# Altium PCB remote.PcbDoc
Units mm, origin at the board's own origin, x right, y up, seen from the top; angles counter-clockwise.
Board outline 152.4 x 101.6 mm, 2 copper layers (Top Layer, Bottom Layer); 18 components, 20 nets, 126 pads, 0 vias.
Unrouted connection lines stored in the file: 19.
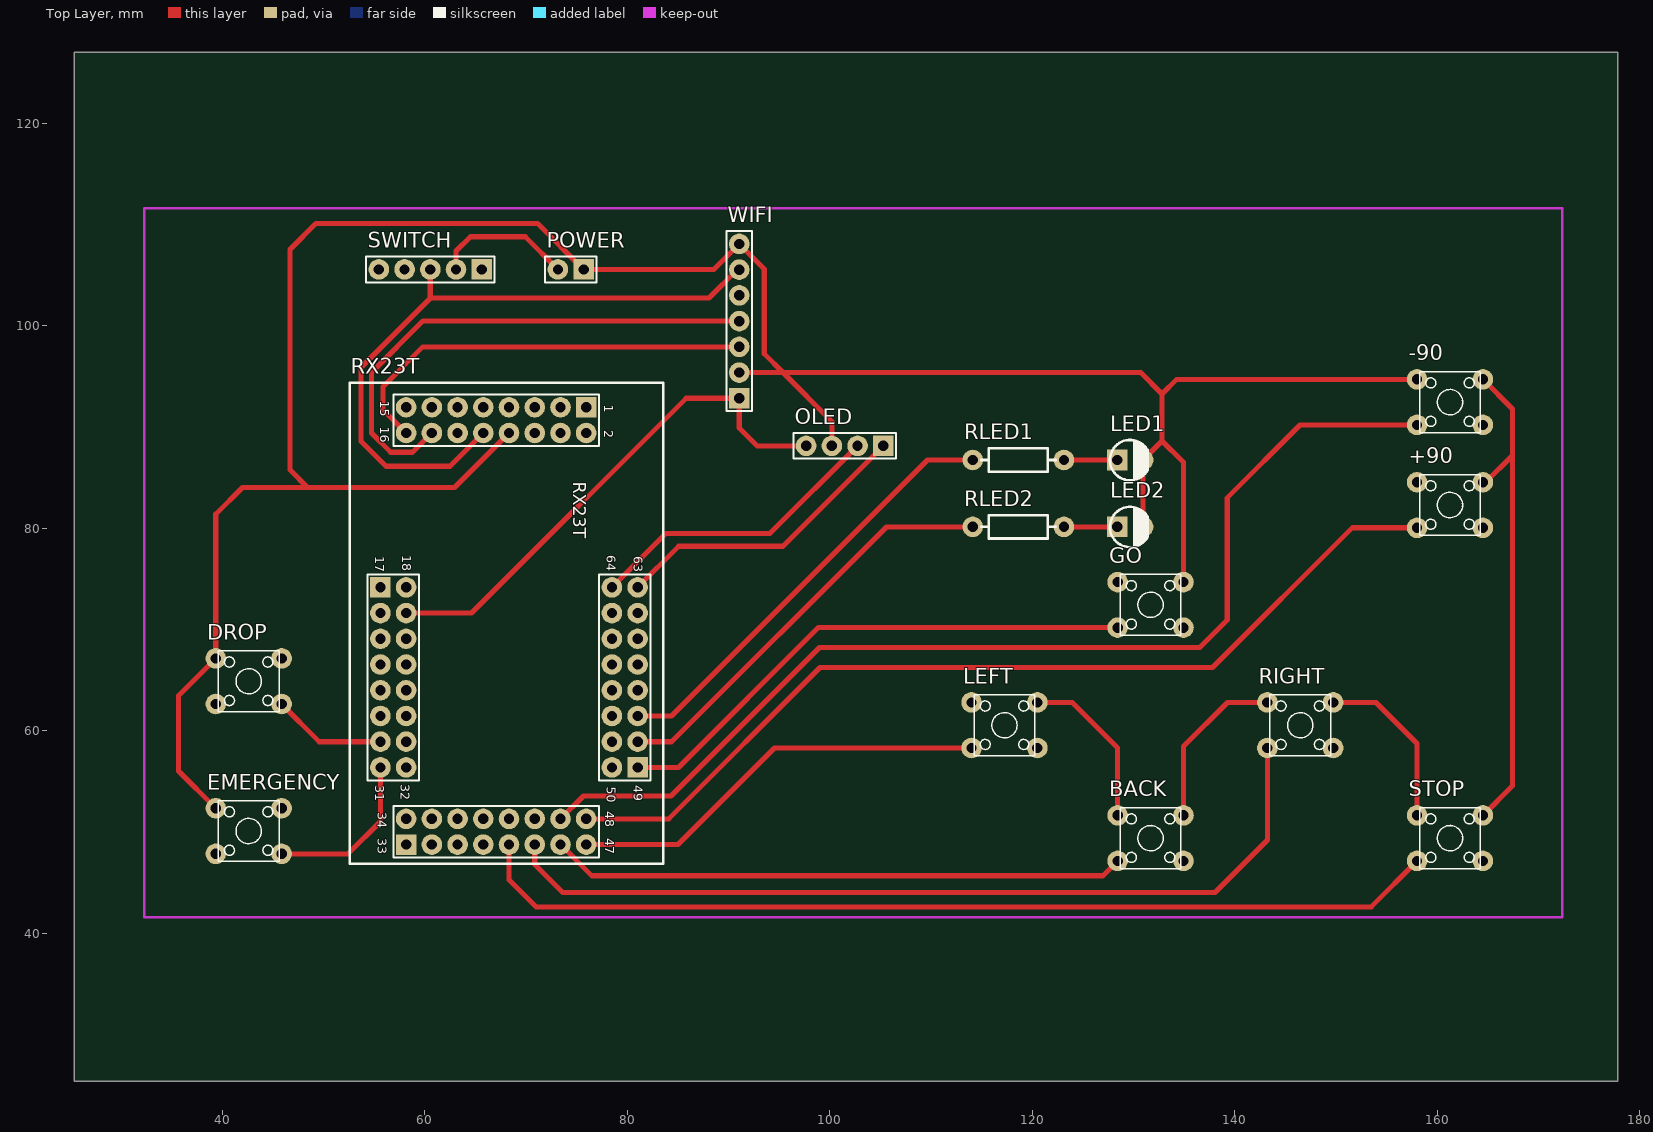
[diagram p0: Top Layer view]
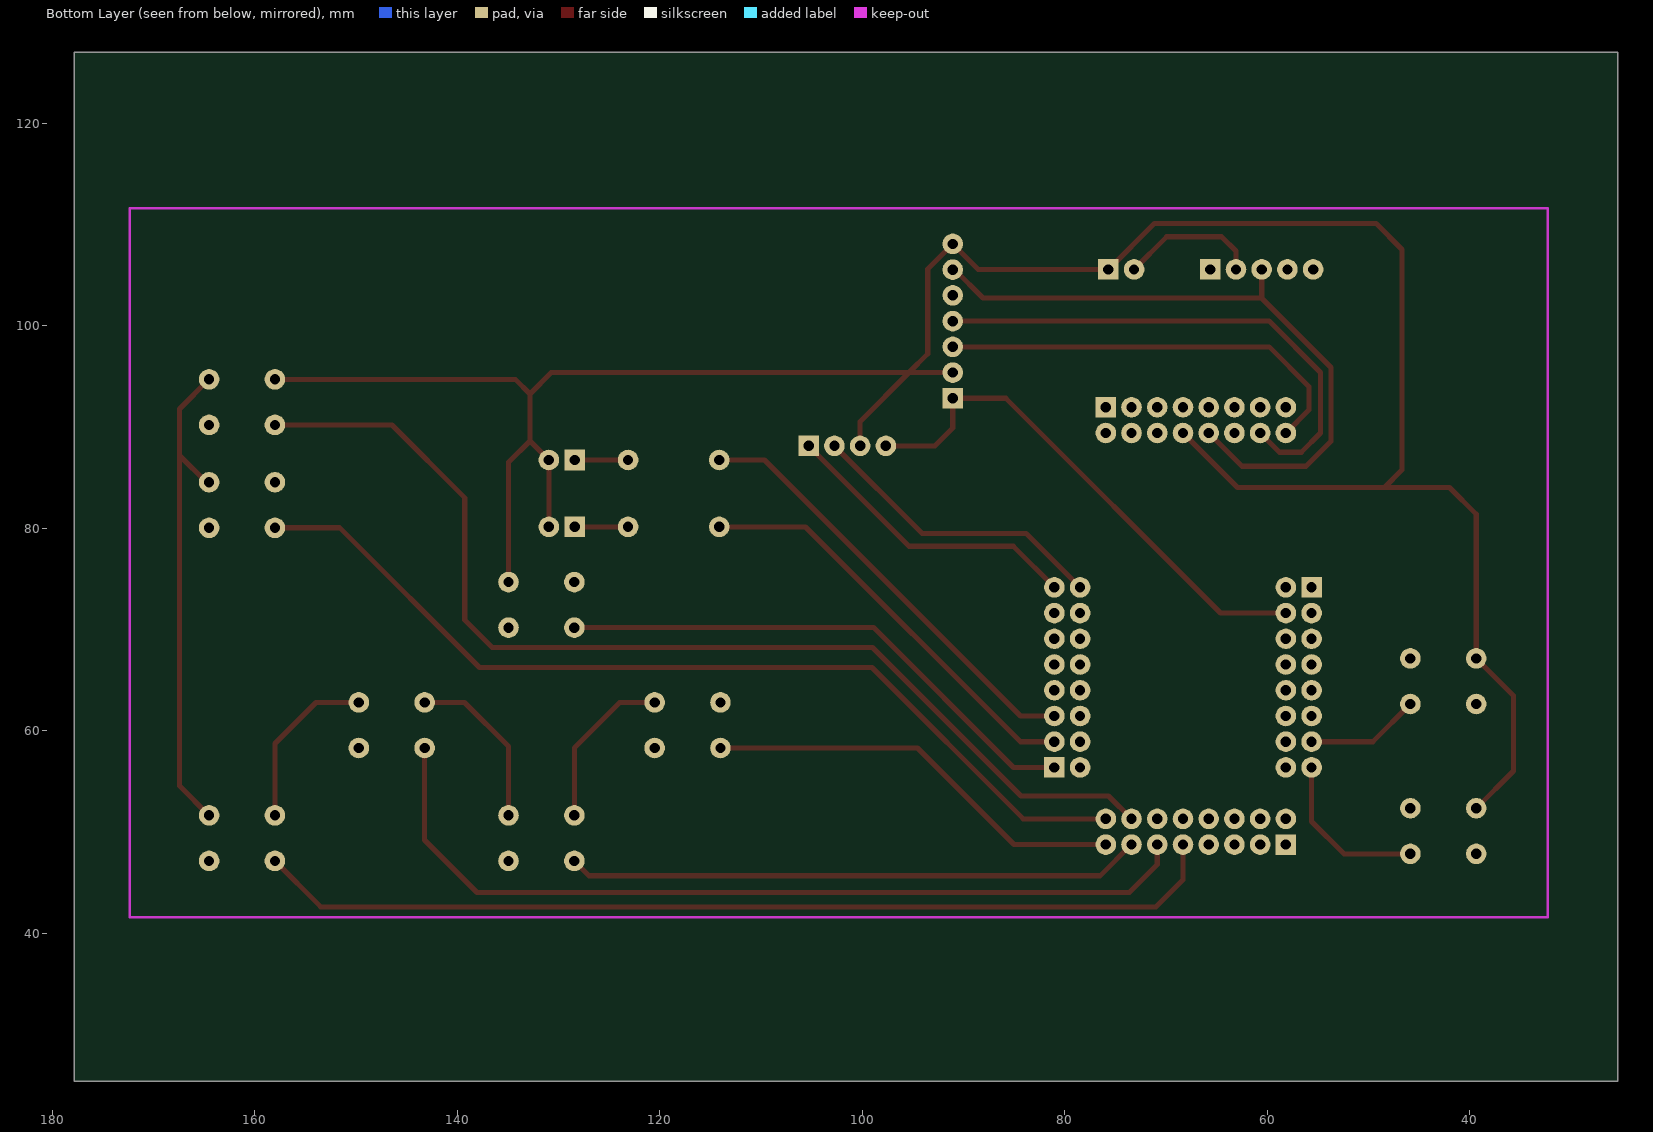
[diagram p1: Bottom Layer view, seen from below]
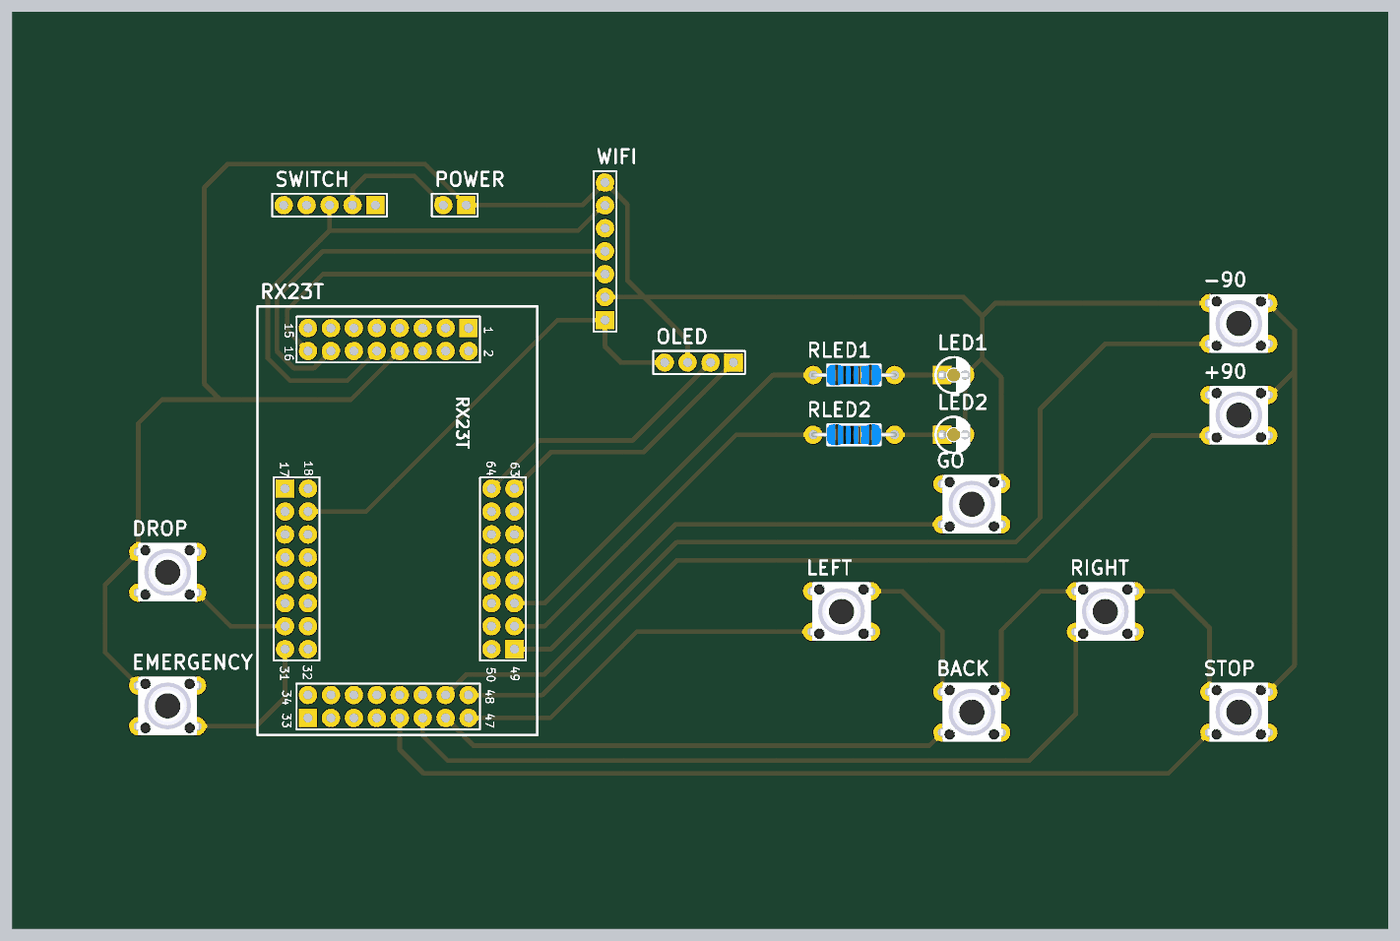
[diagram p2: 3D render of the assembled board from above, using the file's embedded part models]

## Layer stack, top to bottom
Top Solder: solder mask 0.0102, Solder Resist, Dk 3.5
Top Layer: signal copper 0.0356
Dielectric 1: dielectric 0.32, FR-4, Dk 4.8
Bottom Layer: signal copper 0.0356
Bottom Solder: solder mask 0.0102, Solder Resist, Dk 3.5

## Board outline
25.4,25.4 177.8,25.4 177.8,127 25.4,127

## Design rules (kind name [scope] priority, off if disabled: settings)
Clearance [All] p1: gap=0.508
PolygonConnect [All] p1: connectstyle=Relief reliefconductorwidth=0.254 reliefentries=4 polygonreliefangle="90 Angle" airgapwidth=0.254
RoutingVias [All] p1: holewidth=0.711 width=1.27 viastyle="Through Hole" minholewidth=0.711 minwidth=1.27 maxholewidth=0.711 maxwidth=1.27
SolderMaskExpansion [All] p1: expansion=0.102
UnpouredPolygon [All] p1: allowunpoured=FALSE
Width [All] p1: maxlimit=0.508 minlimit=0.508 preferedwidth=0.508
29 further rules are at their usual default settings.

## Components (designator, comment, footprint, x,y, rotation, side; value= is the part's Value field where it differs from the comment)
+90 "贴片轻触开关" SW-6*6 161.239,82.296 r90 top
-90 "贴片轻触开关" SW-6*6 161.239,92.456 r90 top
BACK "贴片轻触开关" SW-6*6 131.674,49.403 r90 top
DROP "贴片轻触开关" SW-6*6 42.621,64.897 r90 top
EMERGENCY "贴片轻触开关" SW-6*6 42.621,50.104 r90 top
GO "贴片轻触开关" SW-6*6 131.674,72.441 r90 top
LED1 "LED" "LED 3MM-R" 129.667,86.741 r0 top
LED2 "LED" "LED 3MM-R" 129.667,80.137 r0 top
LEFT "贴片轻触开关" SW-6*6 117.246,60.554 r90 top
OLED "Header 4" HDR1X4 105.283,88.138 r180 top
POWER "Header 2" HDR1X2 75.692,105.562 r180 top
RIGHT "贴片轻触开关" SW-6*6 146.456,60.554 r90 top
RLED1 "1K" "RS 1/4W" 118.618,86.741 r0 top
RLED2 "1K" "RS 1/4W" 118.618,80.137 r0 top
RX23T "RX23T" RFR 68.326,70.358 r270 top
STOP "贴片轻触开关" SW-6*6 161.239,49.403 r90 top
SWITCH "Header 5" HDR1X5 65.634,105.562 r180 top
WIFI "Header 7" HDR1X7 91.059,92.837 r90 top

## Footprints (in the part's own frame and the unit in brackets; to place one, negate y for a bottom-side part, rotate by r counter-clockwise, add the part's x,y. Pads: shape width x height; smd on the part's side, far side on the other; paste and mask are expansions set on the pad)
HDR1X2 [mil] "Connector; Header; 2 Position"
  rect 80x80 hole 40: 1(0,0)
  round 80 hole 40: 2(100,0)
  silkscreen extent -50,-50 150,50
HDR1X4 [mil] "Connector; Header; 4 Position"
  rect 80x80 hole 40: 1(0,0)
  round 80 hole 40: 2(100,0) 3(200,0) 4(300,0)
  silkscreen extent -50,-50 350,50
HDR1X5 [mil] "Connector; Header; 5 Position"
  rect 80x80 hole 40: 1(0,0)
  round 80 hole 40: 2(100,0) 3(200,0) 4(300,0) 5(400,0)
  silkscreen extent -50,-50 450,50
HDR1X7 [mil] "Connector; Header; 7 Position"
  rect 80x80 hole 40: 1(0,0)
  round 80 hole 40: 2(100,0) 3(200,0) 4(300,0) 5(400,0) 6(500,0) 7(600,0)
  silkscreen extent -50,-50 650,50
"LED 3MM-R" [mil] "红色3mm直插LED"
  rect 80x80 hole 40: 1(-50,0)
  round 80 hole 40: 2(50,0)
  silkscreen extent -79,-79 68,78, body extent -77,-77 65,77, height 219
RFR [mil]
  rect 80x80 hole 40: 1(-850,300) 17(-150,-500) 33(850,-400) 49(550,500)
  round 80 hole 40: 2(-750,300) 3(-850,200) 4(-750,200) 5(-850,100) 6(-750,100) 7(-850,0) 8(-750,0) 9(-850,-100) 10(-750,-100) 11(-850,-200) 12(-750,-200) 13(-850,-300) 14(-750,-300) 15(-850,-400) 16(-750,-400) 18(-150,-400) 19(-50,-500) 20(-50,-400) 21(50,-500) 22(50,-400) 23(150,-500) 24(150,-400) 25(250,-500) 26(250,-400) 27(350,-500) 28(350,-400) 29(450,-500) 30(450,-400) 31(550,-500) 32(550,-400) 34(750,-400) 35(850,-300) 36(750,-300) 37(850,-200) 38(750,-200) 39(850,-100) 40(750,-100) 41(850,0) 42(750,0) 43(850,100) 44(750,100) 45(850,200) 46(750,200) 47(850,300) 48(750,300) 50(550,400) 51(450,500) 52(450,400) 53(350,500) 54(350,400) 55(250,500) 56(250,400) 57(150,500) 58(150,400) 59(50,500) 60(50,400) 61(-50,500) 62(-50,400) 63(-150,500) 64(-150,400)
  silkscreen extent -945,-620 925,600
"RS 1/4W" [mil] "直插色环电阻，脚距9mm，直径2.3mm"
  round 80 hole 40: 1(-177.17,0) 2(177.17,0)
  silkscreen extent -145,-45 145,45, body extent -186,-46 186,46, height 91
SW-6*6 [mil]
  round 80 hole 40: 1(-88.58,-127.95) 1(-88.58,127.95) 2(88.58,127.95) 2(88.58,-127.95)
  silkscreen extent -118,-118 118,118, body extent -128,-163 128,163, height 197

## Part data
OLED: "Header, 4-Pin"
POWER: "Header, 2-Pin"
RLED1 RLED2: library part R, "R_0603"
SWITCH: "Header, 5-Pin"
WIFI: "Header, 7-Pin"

## Nets (pads, with @x,y where several pads share a name; then routed paths per layer and width w, separated by ;. In a path a pad name is that pad's centre, name@x,y a point inside that pad or via, vN(x,y) a via of type N, cw(c..) or ccw(c..) an arc to the next point about the centre after c; other vN are vias at no path point)
3V3: OLED.4 RX23T.10 RX23T.20 SWITCH.3 WIFI.1 WIFI.6 | length 117.8
  Top Layer w0.508: RX23T.20 64.618,71.628 85.827,92.837 WIFI.1 91.059,89.916 92.837,88.138 OLED.4 ; 60.554,102.768 SWITCH.3 ; RX23T.10 62.509,86.131 56.185,86.131 53.721,88.595 53.721,95.885 60.579,102.743 88.062,102.743 90.856,105.537 WIFI.6
+90: +90.1 RX23T.48 | length 93.9
  Top Layer w0.508: RX23T.48 84.099,51.308 99.035,66.243 137.795,66.243 151.598,80.046 +90.1@157.989,80.046
-90: -90.1 RX23T.46 | length 107.8
  Top Layer w0.508: RX23T.46 75.667,53.569 84.328,53.569 98.984,68.224 136.525,68.224 139.243,70.942 139.243,83.007 146.442,90.206 -90.1@157.989,90.206
BACK: BACK.1 RX23T.45 | length 56.9
  Top Layer w0.508: RX23T.45 73.432,48.768 76.505,45.695 126.965,45.695 BACK.1@128.424,47.153
DROP: DROP.1 RX23T.29 | length 11.3
  Top Layer w0.508: DROP.1@45.871,62.647 49.59,58.928 RX23T.29
EMERGENCY: EMERGENCY.1 RX23T.31 | length 16.4
  Top Layer w0.508: EMERGENCY.1@45.871,47.854 52.426,47.854 55.626,51.054 RX23T.31
GND: +90.2 -90.2 BACK.2 DROP.2 EMERGENCY.2 GO.2 LED1.2 LED2.2 LEFT.2 OLED.3 POWER.1 RIGHT.2 RX23T.8 STOP.2 WIFI.2 WIFI.7 | length 357.7
  Top Layer w0.508: EMERGENCY.2@39.371,52.354 35.687,56.038 35.687,63.463 39.371,67.147 39.371,81.383 42.012,84.023 48.438,84.023 ; RX23T.8 62.941,84.023 48.438,84.023 ; WIFI.2 95.377,95.377 ; OLED.3 100.203,90.551 95.377,95.377 ; LEFT.2@120.496,62.804 123.937,62.804 128.424,58.317 BACK.2@128.424,51.653 ; LED2.2 LED1.2 132.817,88.621 ; BACK.2@134.924,51.653 134.924,58.47 139.258,62.804 RIGHT.2@143.206,62.804 ; GO.2@134.924,74.691 134.924,86.514 132.817,88.621 ; RIGHT.2@149.706,62.804 153.935,62.804 157.989,58.749 STOP.2@157.989,51.653 ; -90.2@157.989,94.706 134.254,94.706 132.817,93.269 ; STOP.2@164.489,51.653 167.411,54.575 167.411,87.198 ; +90.2@164.489,84.546 164.759,84.546 167.411,87.198 ; -90.2@164.489,94.706 167.411,91.784 167.411,87.198 ; 48.438,84.023 46.685,85.776 46.685,107.518 49.276,110.109 71.145,110.109 POWER.1 88.544,105.562 WIFI.7 93.523,105.613 93.523,97.231 95.377,95.377 ; 95.377,95.377 130.708,95.377 132.817,93.269 ; 132.817,88.621 132.817,93.269
GO: GO.1 RX23T.49 | length 53.1
  Top Layer w0.508: RX23T.49 85.065,56.388 98.867,70.191 GO.1@128.424,70.191
LED1: RLED1.1 RX23T.53 | length 43.6
  Top Layer w0.508: RX23T.53 84.379,61.468 109.652,86.741 RLED1.1
LED2: RLED2.1 RX23T.51 | length 41.9
  Top Layer w0.508: RX23T.51 84.379,58.928 105.588,80.137 RLED2.1
LEFT: LEFT.1 RX23T.47 | length 42
  Top Layer w0.508: RX23T.47 85.014,48.768 94.549,58.304 LEFT.1@113.996,58.304
NetLED1_1: LED1.1 RLED1.2 | length 5.3
  Top Layer w0.508: RLED1.2 LED1.1
NetLED2_1: LED2.1 RLED2.2 | length 5.3
  Top Layer w0.508: RLED2.2 LED2.1
RIGHT: RIGHT.1 RX23T.43 | length 86.7
  Top Layer w0.508: RX23T.43 70.866,46.812 73.635,44.044 138.024,44.044 143.206,49.226 RIGHT.1@143.206,58.304
RX: RX23T.16 WIFI.3 | length 42.3
  Top Layer w0.508: RX23T.16 55.88,91.694 55.88,93.98 59.817,97.917 WIFI.3
SCL: OLED.2 RX23T.64 | length 30
  Top Layer w0.508: RX23T.64 83.82,79.502 94.107,79.502 OLED.2
SDA: OLED.1 RX23T.63 | length 30
  Top Layer w0.508: RX23T.63 85.09,78.232 95.377,78.232 OLED.1
STOP: RX23T.41 STOP.1 | length 96.1
  Top Layer w0.508: RX23T.41 68.326,45.288 70.993,42.621 153.457,42.621 STOP.1@157.989,47.153
TX: RX23T.14 WIFI.4 | length 51.9
  Top Layer w0.508: RX23T.14 58.801,87.503 56.642,87.503 54.737,89.408 54.737,95.377 59.817,100.457 WIFI.4
VIN: POWER.2 SWITCH.2 | length 13.8
  Top Layer w0.508: SWITCH.2 63.094,107.366 64.516,108.788 69.926,108.788 POWER.2
pads on no net: RX23T.1 RX23T.2 RX23T.3 RX23T.4 RX23T.5 RX23T.6 RX23T.7 RX23T.9 RX23T.11 RX23T.12 RX23T.13 RX23T.15 RX23T.17 RX23T.18 RX23T.19 RX23T.21 RX23T.22 RX23T.23 RX23T.24 RX23T.25 RX23T.26 RX23T.27 RX23T.28 RX23T.30 RX23T.32 RX23T.33 RX23T.34 RX23T.35 RX23T.36 RX23T.37 RX23T.38 RX23T.39 RX23T.40 RX23T.42 RX23T.44 RX23T.50 RX23T.52 RX23T.54 RX23T.55 RX23T.56 RX23T.57 RX23T.58 RX23T.59 RX23T.60 RX23T.61 RX23T.62 SWITCH.1 SWITCH.4 SWITCH.5 WIFI.5

## Keep-outs
Keep-Out Layer:
  lines w0.254: 32.319,41.59 172.319,41.59 172.319,111.59 32.319,111.59 32.319,41.59

## Text inside footprints (layer, text, board x,y; h text height)
RX23T: Top Overlay "64" at 77.978,77.343 h0.89 r270; Top Overlay "63" at 80.645,77.216 h0.89 r270; Top Overlay "49" at 80.645,54.61 h0.89 r270; Top Overlay "50" at 77.978,54.483 h0.89 r270; Top Overlay "48" at 77.851,52.07 h0.89 r270; Top Overlay "47" at 77.851,49.403 h0.89 r270; Top Overlay "33" at 55.372,49.403 h0.89 r270; Top Overlay "34" at 55.372,51.943 h0.89 r270; Top Overlay "32" at 57.658,54.737 h0.89 r270; Top Overlay "31" at 55.118,54.61 h0.89 r270; Top Overlay "17" at 55.118,77.216 h0.89 r270; Top Overlay "18" at 57.785,77.343 h0.89 r270; Top Overlay "16" at 55.626,90.043 h0.89 r270; Top Overlay "15" at 55.626,92.583 h0.89 r270; Top Overlay "1" at 77.724,92.202 h0.89 r270; Top Overlay "2" at 77.724,89.662 h0.89 r270